# EAGLE board Amp Test 7.2.4 (EAGLE 6.4)
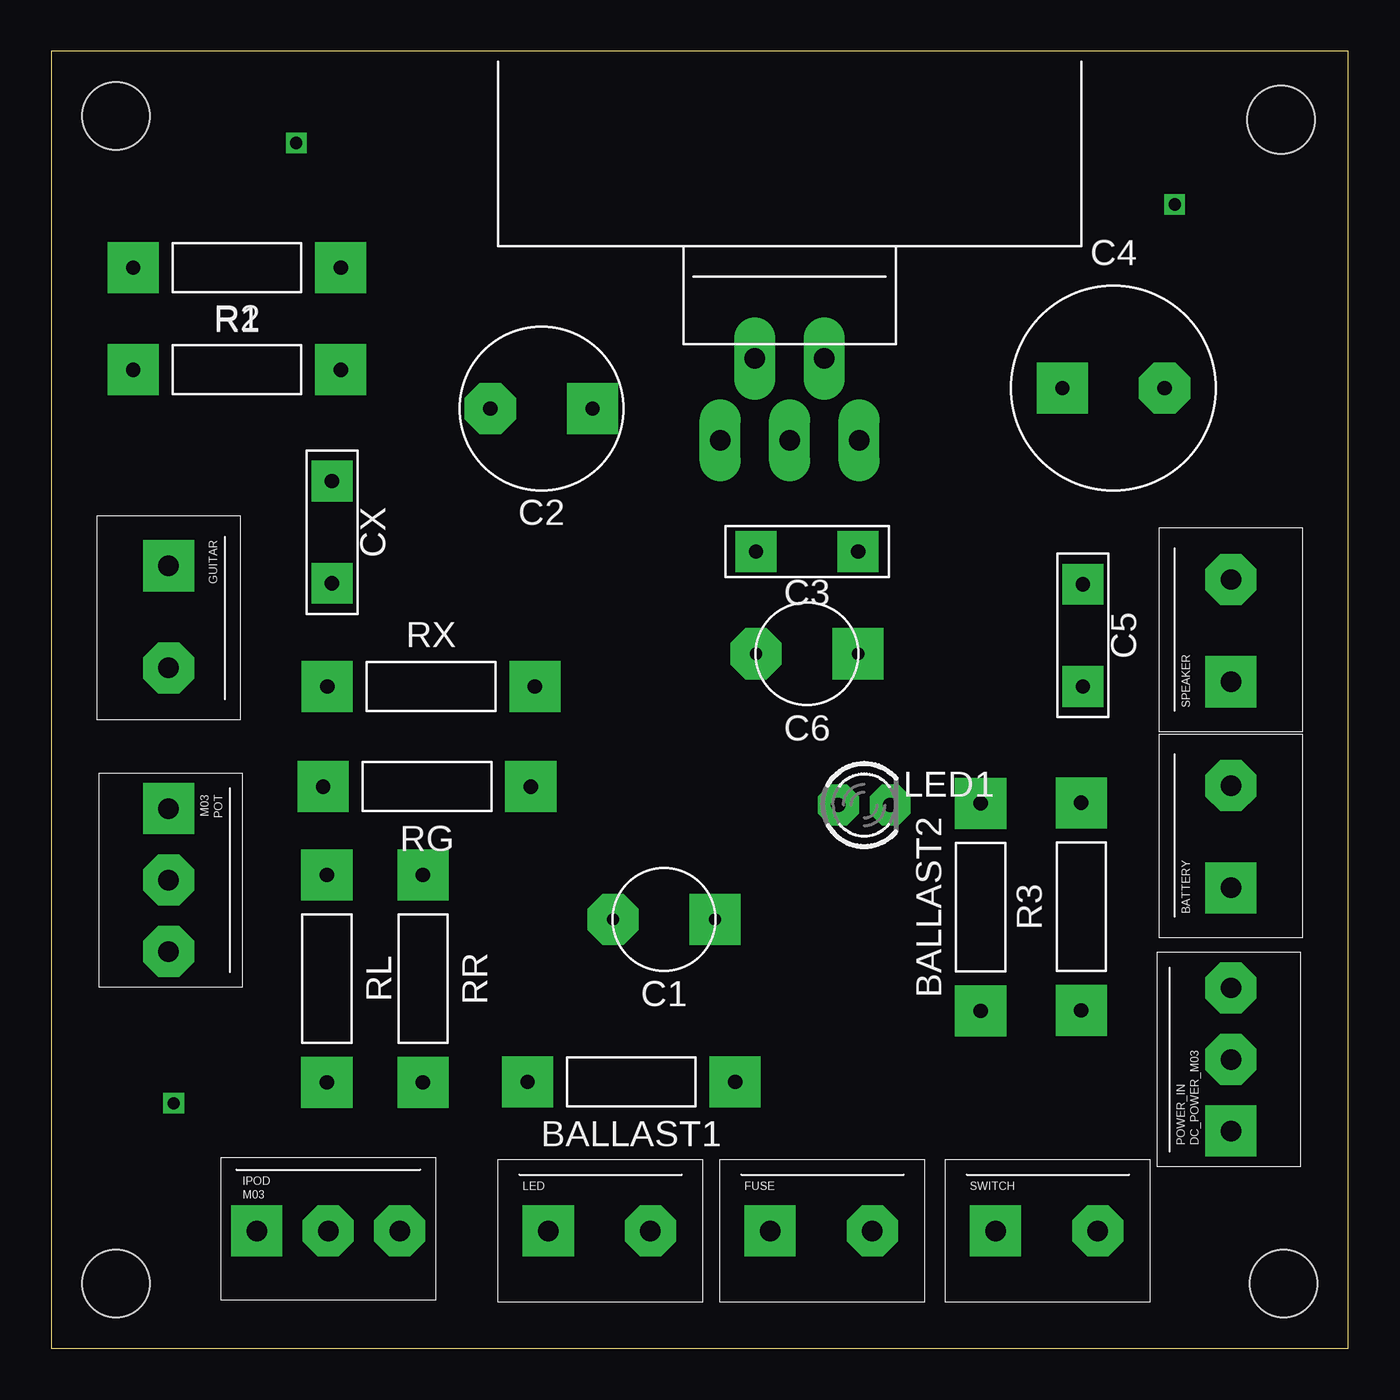
[diagram p0: board, top side]
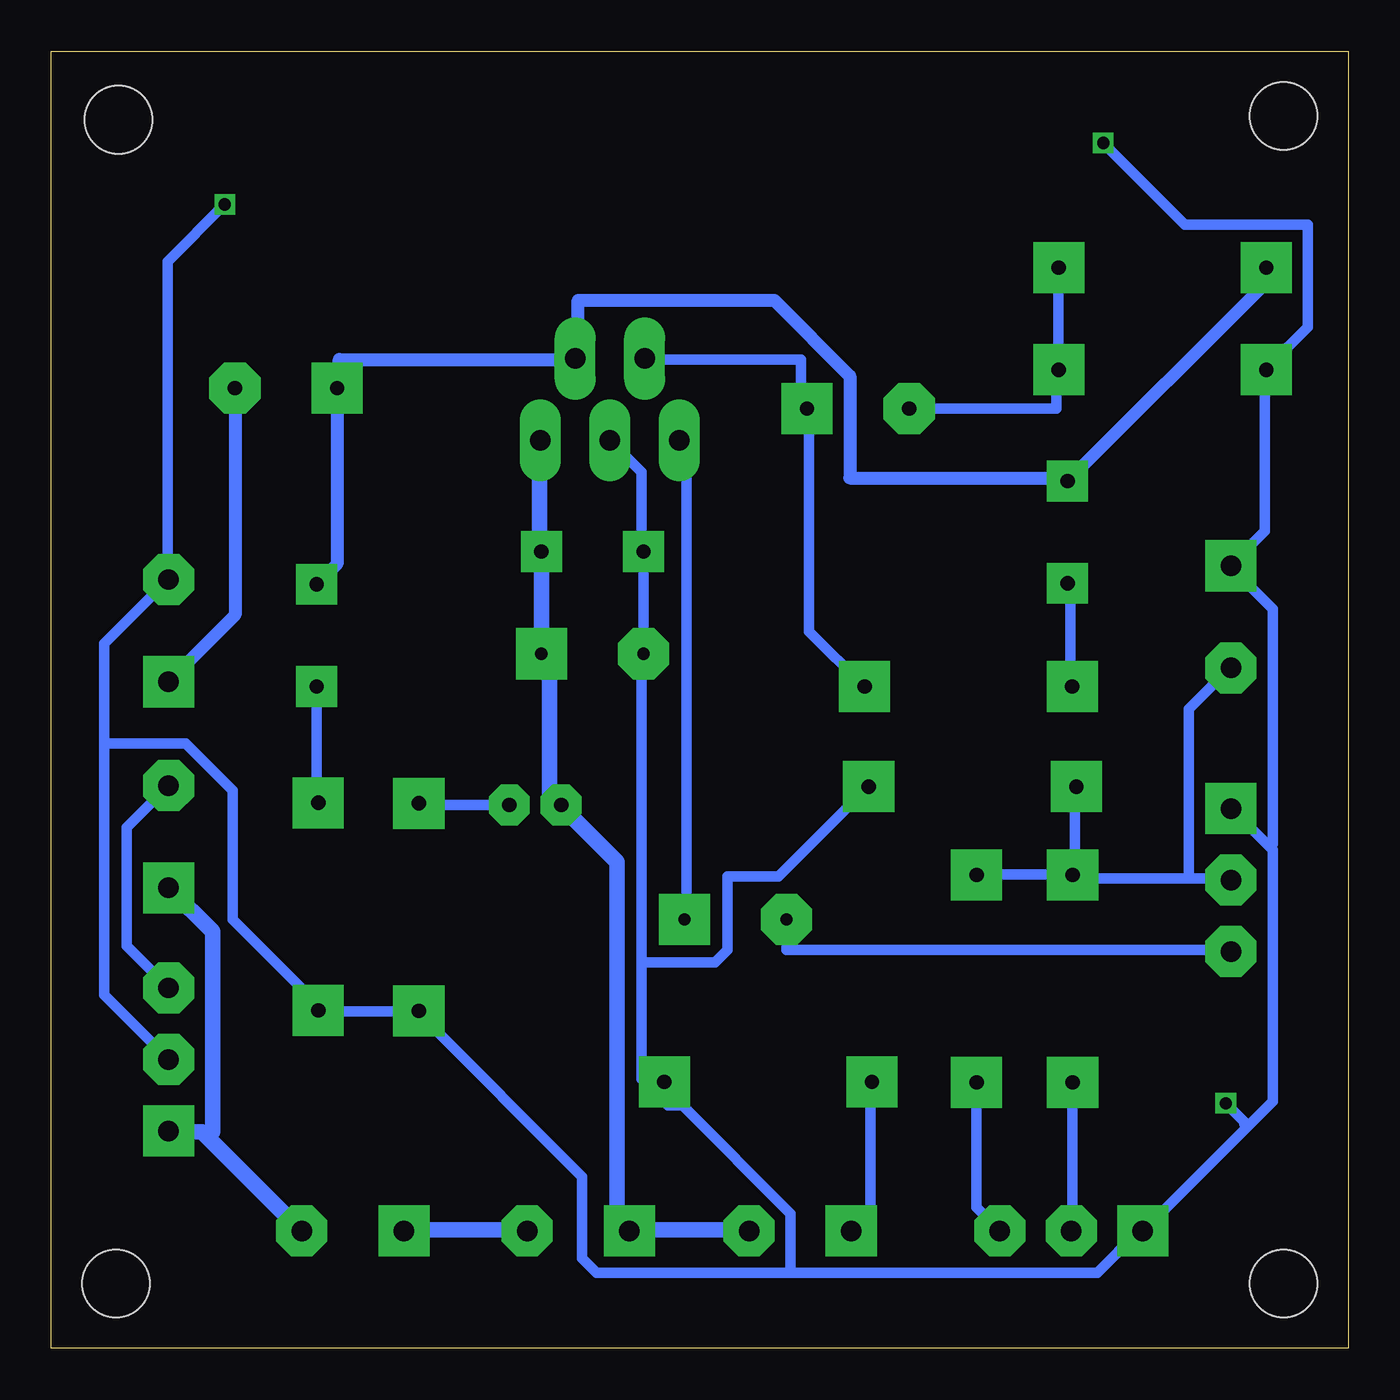
[diagram p1: board, bottom side, seen from below]

Size 63.5 x 63.5 mm. Coordinates in mm from the lower left corner, seen from the top.
Outline: 0,0 63.5,0 63.5,63.5 0,63.5 0,0
Copper layers (1*16): Top 0.035mm / dielectric 1.5mm / Bottom 0.035mm
Design rules "default *": minimum track width 20mil, minimum drill 24mil, track to track 20mil, track to pad 20mil, pad to pad 20mil, via to via 20mil, smd to smd 8mil, copper to edge 10mil, drill to drill 10mil, minimum pad ring 20mil, minimum via ring 8mil, stop-mask expansion 4mil, vias tented up to drill 0mil, thermal gap 10mil
Net classes: 0 default: width 0.254 mm; 1 POWER: width 0.762 mm; 2 GND: width 0.254 mm; 3 Signal: width 0.635 mm
Holes 3.3 mm at 3.17,3.17 3.17,60.33 60.33,3.17 60.21,60.14

## Footprints (pad centres in the part's own frame; a part is rotated, then mirrored left to right if it is on the bottom)
RESISTOR_1/4W = drill 0.7 pad 2.5 square: P$1 -5.08,0; P$2 5.08,0
SCREW_TERMINAL_2_5MM = drill 1 pad 2.5 square: 1 -2.54,0 | drill 1 pad 2.5 octagon: 2 2.46,0
CAP_POL_5MMD_5MML = drill 0.6 pad 2.5 square: + -2.5,0 | drill 0.6 pad 2.5 octagon: - 2.5,0
CAP_POL_8MMD_5MMP = drill 0.7 pad 2.5 square: P$1 -2.5,0 | drill 0.7 pad 2.5 octagon: P$2 2.5,0
CAP_5MM = drill 0.7 pad 2 square: P$1 -2.5,0; P$2 2.5,0
CAP_POL_10MMD_5MMP = drill 0.7 pad 2.5 square: + -2.5,0 | drill 0.7 pad 2.5 octagon: - 2.5,0
SCREW_TERMINAL_2_5MM_3 = drill 1 pad 2.5 square: 1 -3.5,0 | drill 1 pad 2.5 octagon: 2 0,0; 3 3.5,0
LED3MM = drill 0.7 pad 2 octagon: A -1.27,0; K 1.27,0
PENTAWATT = drill 1 pad 0.813 long: 1 -3.4,0; 2 -1.7,4; 3 0,0; 4 1.7,4; 5 3.4,0

## Placement (x,y rotation side)
BALLAST1  2K  [RESISTOR_1/4W]  28.4,13.05 180 top
BALLAST2  8.2K  [RESISTOR_1/4W]  45.5,21.6 90 top
BATTERY  M02  [SCREW_TERMINAL_2_5MM]  57.75,25.09 90 top
C1  10uF  [CAP_POL_5MMD_5MML]  30,21 180 top
C2  470u  [CAP_POL_8MMD_5MMP]  24,46 180 top
C3  100n  [CAP_5MM]  37,39 180 top
C4  1000uF  [CAP_POL_10MMD_5MMP]  52,47 0 top
C5  100n  [CAP_5MM]  50.5,34.9 270 top
C6  100uF  [CAP_POL_5MMD_5MML]  37,34 180 top
CX  100n  [CAP_5MM]  13.75,39.95 270 top
FUSE  M02  [SCREW_TERMINAL_2_5MM]  37.74,5.75 0 top
GUITAR  M02  [SCREW_TERMINAL_2_5MM]  5.75,35.77 270 top
IPOD  M03  [SCREW_TERMINAL_2_5MM_3]  13.57,5.75 0 top
LED  M02  [SCREW_TERMINAL_2_5MM]  26.88,5.75 0 top
LED1  [LED3MM]  39.8,26.6 0 top
POT  M03  [SCREW_TERMINAL_2_5MM_3]  5.75,22.93 270 top
POWER_IN  DC_POWER_M03  [SCREW_TERMINAL_2_5MM_3]  57.75,14.15 90 top
R1  220  [RESISTOR_1/4W]  9.1,52.9 180 top
R2  2.2  [RESISTOR_1/4W]  9.1,47.9 0 top
R3  1  [RESISTOR_1/4W]  50.42,21.63 90 top
RG  5.1k  [RESISTOR_1/4W]  18.4,27.5 180 top
RL  51k  [RESISTOR_1/4W]  13.5,18.1 270 top
RR  51k  [RESISTOR_1/4W]  18.2,18.1 270 top
RX  43  [RESISTOR_1/4W]  18.6,32.4 0 top
SPEAKER  M02  [SCREW_TERMINAL_2_5MM]  57.75,35.17 90 top
SWITCH  M02  [SCREW_TERMINAL_2_5MM]  48.77,5.75 0 top
TDA2003  TDA2003APENTAWATT  [PENTAWATT]  36.15,44.45 0 top

## Library data of the parts
BALLAST1 BALLAST2 BATTERY C1-C6 CX FUSE GUITAR IPOD LED POT POWER_IN R1-R3 RG RL RR RX SPEAKER SWITCH TDA2003 = ERIC
LED1 = led

## Nets
AUDIO_IN: GUITAR.2 POT.2 RG.P$2 RL.P$1 RR.P$1
GND [GND]: BALLAST1.P$1 BALLAST2.P$1 C3.P$2 C6.- GUITAR.1 IPOD.1 POT.1 POWER_IN.2 R2.P$1 R3.P$1 RG.P$1 SPEAKER.2 TDA2003.3
N$1: C1.+ TDA2003.1
N$2: BATTERY.2 POWER_IN.3
N$3 [Signal]: C4.+ C5.P$1 CX.P$1 R1.P$2 TDA2003.4
N$4: C2.P$2 R1.P$1 R2.P$2
N$5: C5.P$2 R3.P$2
N$6: C2.P$1 RX.P$2 TDA2003.2
N$7: CX.P$2 RX.P$1
N$8: BALLAST1.P$2 LED.1
N$9 [Signal]: C4.- SPEAKER.1
N$10 [POWER]: FUSE.2 SWITCH.1
N$11 [POWER]: BATTERY.1 POWER_IN.1 SWITCH.2
N$12: BALLAST2.P$2 LED1.K
N$13: IPOD.2 RL.P$2
N$14: IPOD.3 RR.P$2
N$15: C1.- POT.3
POWER [POWER]: C3.P$1 C6.+ FUSE.1 LED1.A LED.2 TDA2003.5

## Tracks (layer width: path | path; a pad name or v marks a point on that pad's centre or on a via)
AUDIO_IN
  Bottom 0.508: 7.8,23 13.5,23 RL.P$1 | 7.8,23 5.8,23 POT.2 | RR.P$1 18.2,23.2 13.7,23.2 RL.P$1 | 7.8,23 7.8,31.3 5.8,33.3 GUITAR.2 | RG.P$2 13.4,27.5 13.4,23.4 RL.P$1
GND  (via drill 0.6)
  Bottom 0.508: 4.95,10.85 3.7,12.1 3.7,24.4 3.85,24.55 | 4.95,10.85 10,5.8 IPOD.1 10.3,5.7 12.3,3.7 27.3,3.7 | 3.85,24.55 5.7,26.4 POT.1 | 3.85,24.55 3.7,24.7 3.7,36.2 5.6,38.1 GUITAR.1 5.7,38.4 4.1,40 4.1,47.9 R2.P$1 3.9,48.1 2,50 2,55 8,55 v12,59 | 60.9,29.6 60.9,34.5 57.8,37.6 SPEAKER.2 57.8,37.9 57.8,53.2 v55,56 | 60.9,29.6 60.9,17.3 57.8,14.2 POWER_IN.2 | 60.9,29.6 56.9,29.6 54.6,27.3 54.6,21 50.4,16.8 R3.P$1 50.4,16.5 45.5,16.5 BALLAST2.P$1 45.4,16.3 37.5,8.4 37.5,4.4 36.8,3.7 27.3,3.7 | TDA2003.3 36.1,44.4 34.6,42.9 34.6,39.2 C3.P$2 C6.- 34.6,33.8 34.6,18.9 | 34.6,18.9 34.6,13.2 33.5,12.1 BALLAST1.P$1 33.3,11.9 32.6,11.9 27.3,6.6 27.3,3.7 | 34.6,18.9 31,18.9 30.4,19.5 30.4,23.1 27.9,23.1 23.5,27.5 RG.P$1 | v6,12 5.1,11.1 5.1,11 4.95,10.85
N$1
  Bottom 0.508: C1.+ 32.4,21.1 32.4,44.1 32.7,44.4 TDA2003.1
N$2
  Bottom 0.508: POWER_IN.3 57.8,17.7 59.8,19.7 59.8,25.5 57.8,27.5 BATTERY.2
N$3
  Bottom 0.635: R1.P$2 4.1,52.9 4.1,52.1 CX.P$1 14,42.6 24.4,42.6 24.4,47.6 28.1,51.3 37.7,51.3 37.7,48.7 TDA2003.4 37.9,48.4 49.4,48.4 49.4,47.3 C4.+ 49.5,38.4 C5.P$1
N$4
  Bottom 0.508: R1.P$1 14.2,52.9 14.2,47.9 R2.P$2 14.3,47.7 14.3,46 C2.P$2
N$5
  Bottom 0.508: C5.P$2 50.5,26.8 R3.P$2
N$6
  Bottom 0.508: TDA2003.2 34.4,48.4 26.8,48.4 26.8,46.3 C2.P$1 26.4,45.8 26.4,35.1 23.7,32.4 RX.P$2
N$7
  Bottom 0.508: CX.P$2 13.6,37.3 13.6,32.4 RX.P$1
N$8
  Bottom 0.508: LED.1 24.3,5.8 23.4,6.7 23.4,12 BALLAST1.P$2
N$9
  Bottom 0.635: C4.- 54.5,35.9 57.7,32.7 SPEAKER.1
N$10
  Bottom 0.508: 40.2,5.8 FUSE.2 | 46.2,5.8 SWITCH.1
  Bottom 0.762: FUSE.2 40.4,5.8 46,5.8 SWITCH.1
N$11
  Bottom 0.762: 55.85,10.35 56.1,10.6 57.7,10.6 POWER_IN.1 | 55.85,10.35 51.3,5.8 SWITCH.2 | BATTERY.1 57.7,22.5 55.6,20.4 55.6,10.6 55.85,10.35
N$12
  Bottom 0.508: LED1.K 45.5,26.6 BALLAST2.P$2
N$13
  Bottom 0.508: RL.P$2 13.5,5.8 IPOD.2
N$14
  Bottom 0.508: RR.P$2 18.2,6.9 17.1,5.8 IPOD.3
N$15
  Bottom 0.508: C1.- 27.5,19.5 5.8,19.5 POT.3
POWER
  Bottom 0.762: LED.2 29.4,5.8 35.1,5.8 FUSE.1 35.5,6 35.8,6.3 35.8,23.8 38.3,26.3 LED1.A 38.6,26.6 39.1,27.1 39.1,33.5 39.3,33.7 C6.+ C3.P$1 39.6,39.3 39.6,44.4 TDA2003.5